# Allegro board AC7Z035.brd
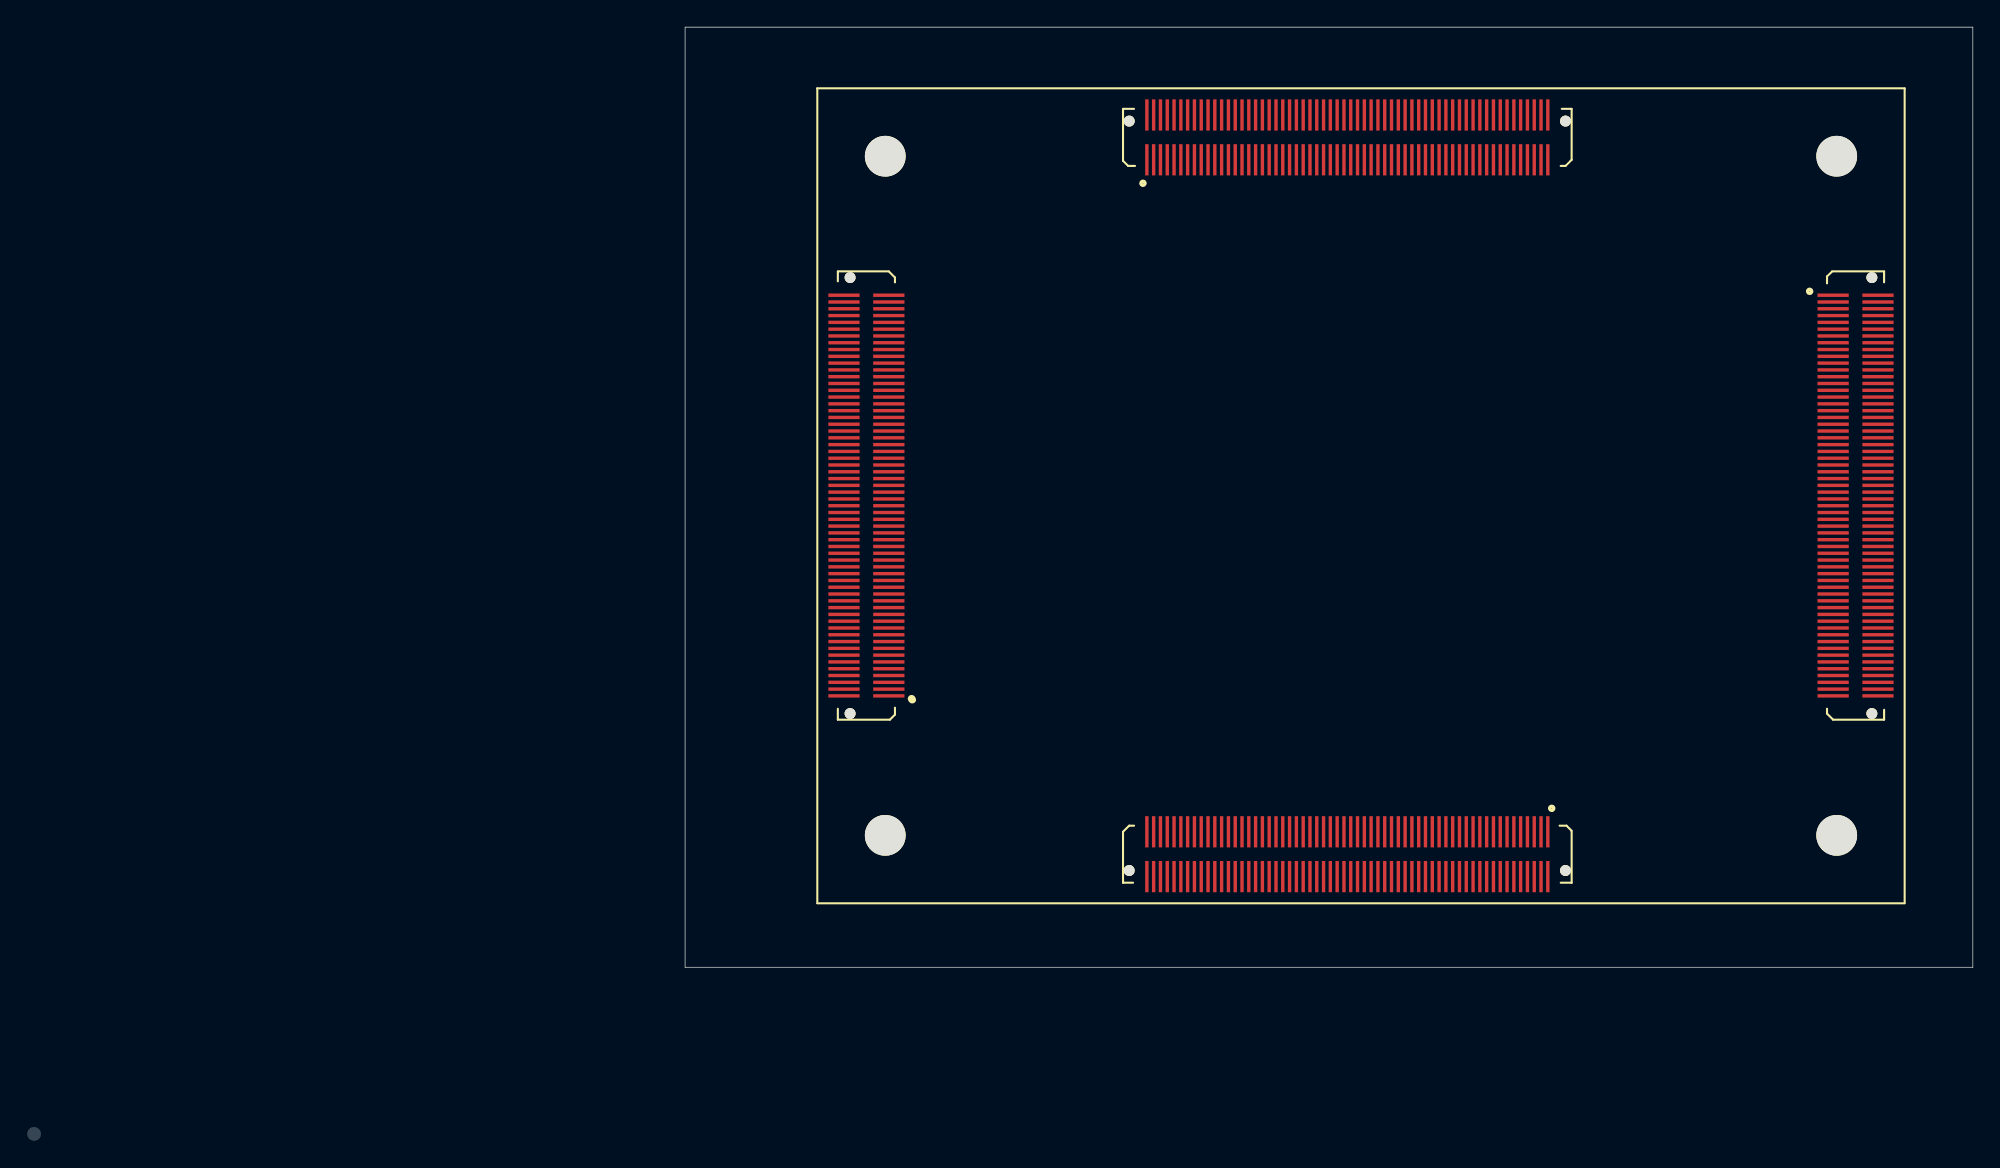
[diagram p0: board, top side]
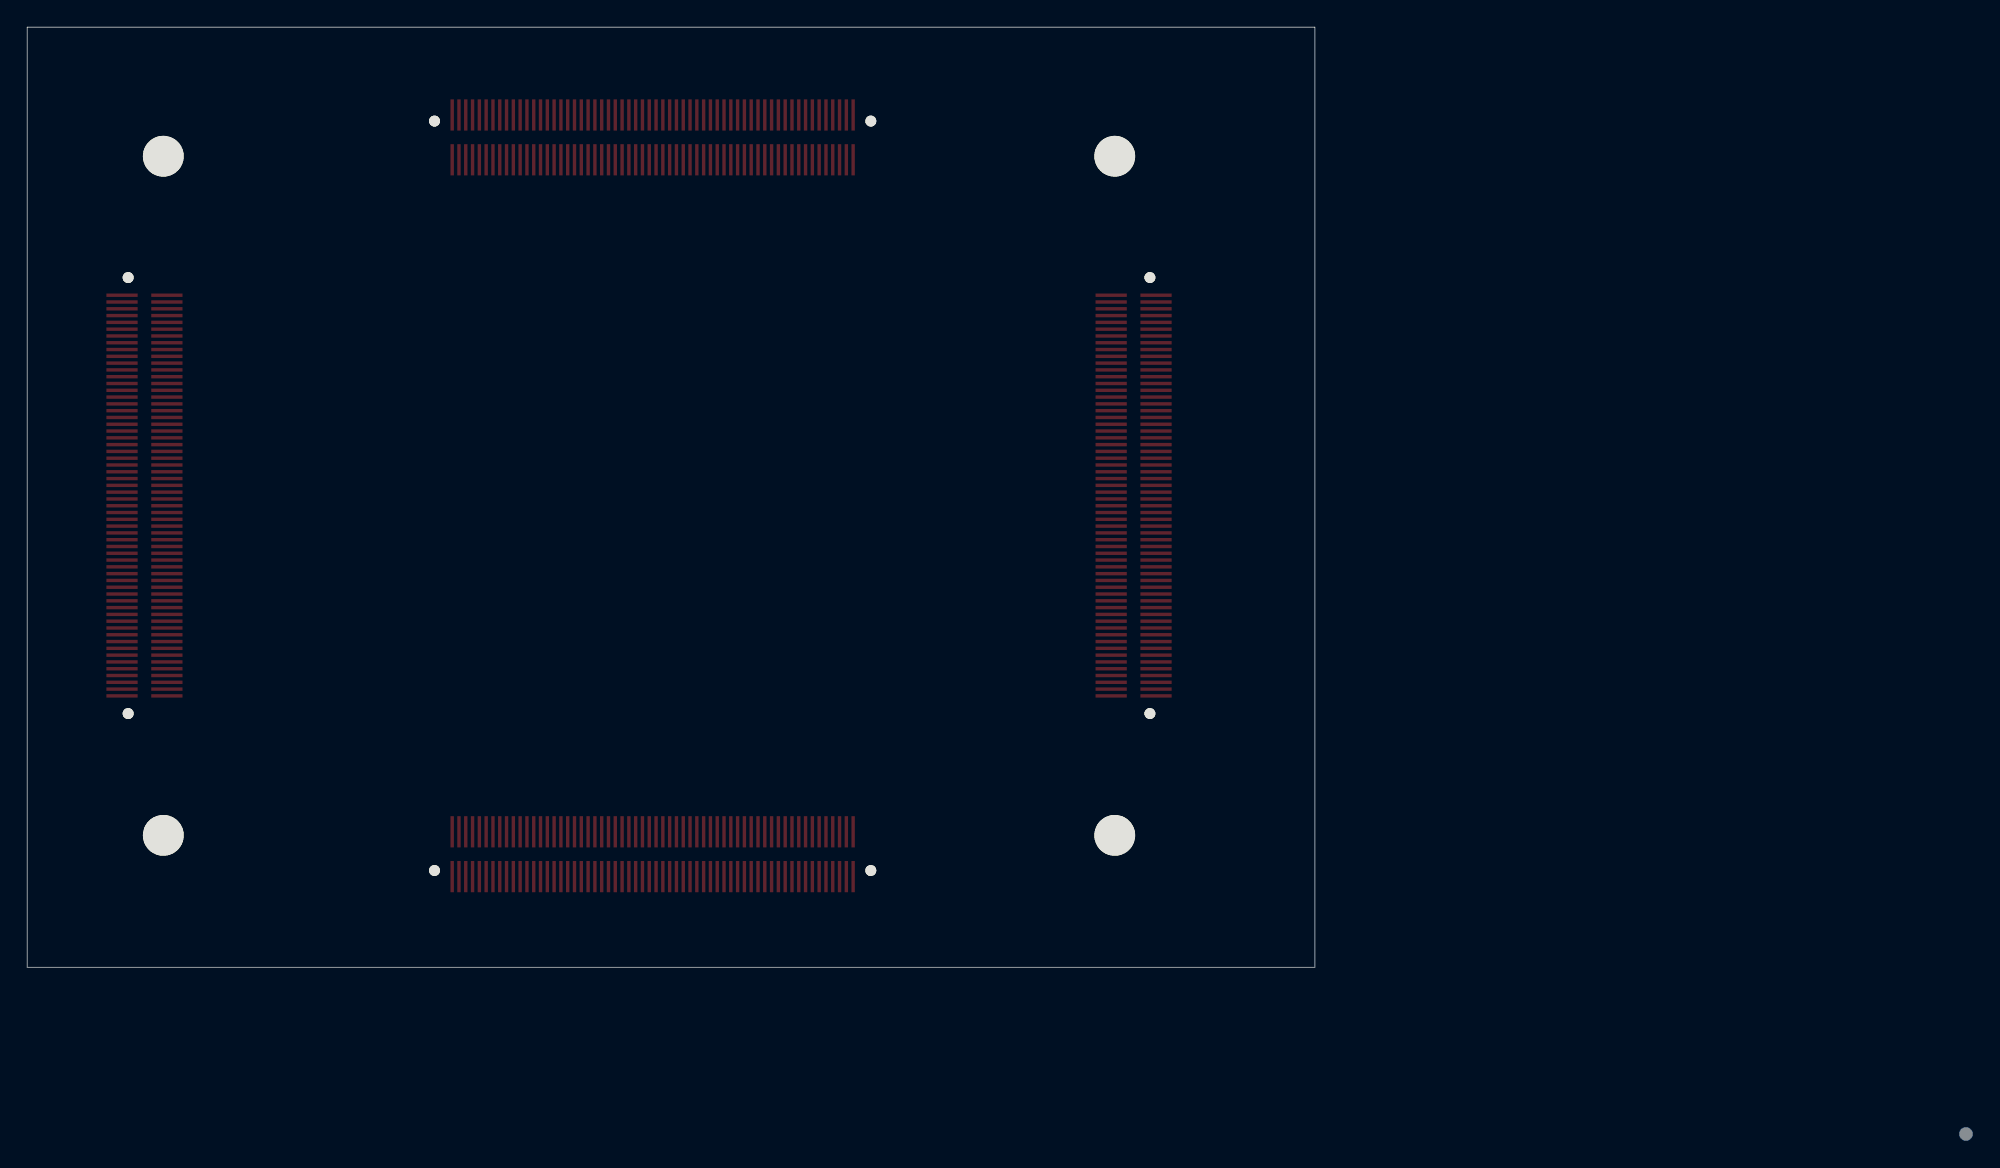
[diagram p1: board, bottom side, seen from below]

Outline 94.74 x 69.22 mm; copper layers: TOP, L2_GND, L3, L4_VCC, L5_GND, BOTTOM. Coordinates in mm from the lower left corner of the outline.
Outline path: 0,69.22 0,0 94.74,0 94.74,69.22 0,69.22

## Design rules (mm)
net group GTX_CLK0_C_N: nets GTX_CLK0_C_N GTX_CLK0_C_P
net group GTX_CLK1_C_P: nets GTX_CLK1_C_N GTX_CLK1_C_P
net group GTX_CLK2_C_P: nets GTX_CLK2_C_N GTX_CLK2_C_P
net group IO1_12P: nets IO1_12N IO1_12P
net group IO1_16P: nets IO1_16N IO1_16P
net group LP_CLK_P: nets LP_CLK_N LP_CLK_P
net group LP_LANE0_N: nets LP_LANE0_N LP_LANE0_P
net group LP_LANE1_N: nets LP_LANE1_N LP_LANE1_P
net group PHY_MDI0_N: nets PHY1_MDI0_N PHY1_MDI0_P
net group USB: nets N16523963 N16524061
net group 90OHM: nets DN1 DN2 DN3 DN4 DP1 DP2 DP3 DP4 OTG_D_N OTG_D_P USB_DM USB_DP
net group ETH_RX: nets FPGA_TCK FPGA_TDI FPGA_TMS PHY1_RXCK PHY1_RXCTL PHY1_RXD0 PHY1_RXD1 PHY1_RXD2 PHY1_RXD3 PHY2_RXCK PHY2_RXCTL PHY2_RXD0 PHY2_RXD1 PHY2_RXD2 PHY2_RXD3
net group ETH_TX: nets PHY1_TXCK PHY1_TXCTL PHY1_TXD0 PHY1_TXD1 PHY1_TXD2 PHY1_TXD3 PHY2_TXCK PHY2_TXCTL PHY2_TXD0 PHY2_TXD1 PHY2_TXD2 PHY2_TXD3
net group HDMI: nets HDMI_TX0+ HDMI_TX0- HDMI_TX1+ HDMI_TX1- HDMI_TX2+ HDMI_TX2- HDMI_TXC+ HDMI_TXC- RX_0N RX_0P RX_1N RX_1P RX_2N RX_2P RX_CN RX_CP
net group IO1-DIFF: nets B12_L1_N B12_L1_P B12_L2_N B12_L2_P EX_IO1_1N EX_IO1_1P EX_IO1_2N EX_IO1_2P EX_IO1_3N EX_IO1_3P EX_IO1_4N EX_IO1_4P EX_IO1_5N EX_IO1_5P EX_IO1_6N EX_IO1_6P EX_IO1_7N EX_IO1_7P EX_IO1_8N EX_IO1_8P EX_IO1_9N EX_IO1_9P EX_IO1_10N EX_IO1_10P EX_IO1_11N EX_IO1_11P EX_IO1_12N EX_IO1_12P EX_IO1_13N EX_IO1_13P EX_IO1_14N EX_IO1_14P EX_IO1_15N EX_IO1_15P EX_IO1_16N EX_IO1_16P EX_IO1_17N EX_IO1_17P FAN_PWM IO1_3N IO1_3P IO1_4N IO1_4P IO1_5N IO1_5P IO1_6N IO1_6P IO1_7N IO1_7P IO1_8N IO1_8P IO1_9N IO1_9P IO1_10N IO1_10P IO1_11N IO1_11P IO1_13N IO1_13P IO1_14N IO1_14P IO1_15N IO1_15P IO1_17N IO1_17P
net group MIPI: nets MIPI_CLK_N MIPI_CLK_P MIPI_LAN0_N MIPI_LAN0_P MIPI_LAN1_N MIPI_LAN1_P
net group OTG_DATA: nets OTG_CLK OTG_DATA0 OTG_DATA1 OTG_DATA2 OTG_DATA3 OTG_DATA4 OTG_DATA5 OTG_DATA6 OTG_DATA7 OTG_DIR OTG_NXT OTG_STP
net group PCIE: nets N23088557 N23088559 N23088561 N23088563 N23088565 N23088567 N23088569 N23088571 N23088604 N23088606 N23088796 N23088798 N23088830 N23088832 N23088856 N23088858 N23088877 N23088892
net group PHY_MDI: nets PHY1_MDI1_N PHY1_MDI1_P PHY1_MDI2_N PHY1_MDI2_P PHY1_MDI3_N PHY1_MDI3_P PHY2_MDI0_N PHY2_MDI0_P PHY2_MDI1_N PHY2_MDI1_P PHY2_MDI2_N PHY2_MDI2_P PHY2_MDI3_N PHY2_MDI3_P
net group SATA-DIFF: nets GTX_CLK0_N GTX_CLK0_P GTX_CLK1_N GTX_CLK1_P GTX_CLK2_N GTX_CLK2_P REF_CLK0_N REF_CLK0_P SATA1_RX_N SATA1_RX_P SATA1_TX_C_N SATA1_TX_C_P SATA2_RX_C_N SATA2_RX_C_P SATA2_RX_N SATA2_RX_P SATA2_TX_N SATA2_TX_P
net group SD_D: nets SD_CLK SD_CMD SD_D0 SD_D1 SD_D2 SD_D3
nets with their own width: min track width 0.203; nets GND
nets with their own width: min track width 0.254; nets +3.3V

## Placement (name value [footprint] x y rotation side)
J29  -  [AXK620337YG]  48.72 8.32 180 top
J30  -  [AXK620337YG]  13.34 34.73 90 top
J31  -  [AXK620337YG]  48.72 61.1 0 top
J32  -  [AXK620337YG]  86.11 34.73 270 top
NOREF  -  [unnamed]  49.73 34.71 180 top
NOREF#2  -  [#2]  163.82 -6.89 90 top
NOREF#3  -  [#2]  -50.04 90.6 0 top
NOREF#4  -  [unnamed#3]  -47.9 -12.27 0 bottom

## Library data of the parts
J29-J32 = CONN SOCKET 60x2_0

## Footprints (pads in the part's own frame, mm; a bottom-side part is the same pattern mirrored in y, then rotated)
AXK620337YG
  round 0.8 hole 0.8 unplated: (-16.05,1.2) (16.05,1.2)
  rect 0.25x2.3 smd: 1(-14.75,-1.65) 2(-14.75,1.65) 3(-14.25,-1.65) 4(-14.25,1.65) 5(-13.75,-1.65) 6(-13.75,1.65) 7(-13.25,-1.65) 8(-13.25,1.65) 9(-12.75,-1.65) 10(-12.75,1.65) 11(-12.25,-1.65) 12(-12.25,1.65) 13(-11.75,-1.65) 14(-11.75,1.65) 15(-11.25,-1.65) 16(-11.25,1.65) 17(-10.75,-1.65) 18(-10.75,1.65) 19(-10.25,-1.65) 20(-10.25,1.65) 21(-9.75,-1.65) 22(-9.75,1.65) 23(-9.25,-1.65) 24(-9.25,1.65) 25(-8.75,-1.65) 26(-8.75,1.65) 27(-8.25,-1.65) 28(-8.25,1.65) 29(-7.75,-1.65) 30(-7.75,1.65) 31(-7.25,-1.65) 32(-7.25,1.65) 33(-6.75,-1.65) 34(-6.75,1.65) 35(-6.25,-1.65) 36(-6.25,1.65) 37(-5.75,-1.65) 38(-5.75,1.65) 39(-5.25,-1.65) 40(-5.25,1.65) 41(-4.75,-1.65) 42(-4.75,1.65) 43(-4.25,-1.65) 44(-4.25,1.65) 45(-3.75,-1.65) 46(-3.75,1.65) 47(-3.25,-1.65) 48(-3.25,1.65) 49(-2.75,-1.65) 50(-2.75,1.65) 51(-2.25,-1.65) 52(-2.25,1.65) 53(-1.75,-1.65) 54(-1.75,1.65) 55(-1.25,-1.65) 56(-1.25,1.65) 57(-0.75,-1.65) 58(-0.75,1.65) 59(-0.25,-1.65) 60(-0.25,1.65) 61(0.25,-1.65) 62(0.25,1.65) 63(0.75,-1.65) 64(0.75,1.65) 65(1.25,-1.65) 66(1.25,1.65) 67(1.75,-1.65) 68(1.75,1.65) 69(2.25,-1.65) 70(2.25,1.65) 71(2.75,-1.65) 72(2.75,1.65) 73(3.25,-1.65) 74(3.25,1.65) 75(3.75,-1.65) 76(3.75,1.65) 77(4.25,-1.65) 78(4.25,1.65) 79(4.75,-1.65) 80(4.75,1.65) 81(5.25,-1.65) 82(5.25,1.65) 83(5.75,-1.65) 84(5.75,1.65) 85(6.25,-1.65) 86(6.25,1.65) 87(6.75,-1.65) 88(6.75,1.65) 89(7.25,-1.65) 90(7.25,1.65) 91(7.75,-1.65) 92(7.75,1.65) 93(8.25,-1.65) 94(8.25,1.65) 95(8.75,-1.65) 96(8.75,1.65) 97(9.25,-1.65) 98(9.25,1.65) 99(9.75,-1.65) 100(9.75,1.65) 101(10.25,-1.65) 102(10.25,1.65) 103(10.75,-1.65) 104(10.75,1.65) 105(11.25,-1.65) 106(11.25,1.65) 107(11.75,-1.65) 108(11.75,1.65) 109(12.25,-1.65) 110(12.25,1.65) 111(12.75,-1.65) 112(12.75,1.65) 113(13.25,-1.65) 114(13.25,1.65) 115(13.75,-1.65) 116(13.75,1.65) 117(14.25,-1.65) 118(14.25,1.65) 119(14.75,-1.65) 120(14.75,1.65)
unnamed
  round 6.35 hole 3 unplated: (-35,25) (-35,-25) (35,25) (35,-25)
unnamed#3
  round 1.016 smd: 1(0,0)

## Nets
+5V: J32.107(54) J32.108(114) J32.109(55) J32.110(115) J32.111(56) J32.112(116) J32.113(57) J32.114(117) J32.115(58) J32.116(118) J32.117(59) J32.118(119) J32.119(60) J32.120
GND: J29.5(3) J29.6(63) J29.11(6) J29.12(66) J29.17(9) J29.18(69) J29.23(12) J29.24(72) J29.29(15) J29.30(75) J29.35(18) J29.36(78) J29.41(21) J29.42(81) J29.47(24) J29.48(84) J29.53(27) J29.54(87) J29.59(30) J29.60(90) J29.65(33) J29.66(93) J29.71(36) J29.72(96) J29.77(39) J29.78(99) J29.83(42) J29.84(102) J29.89(45) J29.90(105) J29.95(48) J29.96(108) J29.101(51) J29.102(111) J29.107(54) J29.108(114) J29.113(57) J29.114(117) J29.119(60) J29.120 J30.5(3) J30.6(63) J30.11(6) J30.12(66) J30.17(9) J30.18(69) J30.23(12) J30.24(72) J30.29(15) J30.30(75) J30.35(18) J30.36(78) J30.41(21) J30.42(81) J30.47(24) J30.48(84) J30.53(27) J30.54(87) J30.59(30) J30.60(90) J30.65(33) J30.66(93) J30.71(36) J30.72(96) J30.77(39) J30.78(99) J30.83(42) J30.84(102) J30.89(45) J30.90(105) J30.95(48) J30.96(108) J30.101(51) J30.102(111) J30.107(54) J30.108(114) J30.113(57) J30.114(117) J30.119(60) J30.120 J31.5(3) J31.6(63) J31.11(6) J31.12(66) J31.17(9) J31.18(69) J31.23(12) J31.24(72) J31.29(15) J31.30(75) J31.35(18) J31.36(78) J31.41(21) J31.42(81) J31.47(24) J31.48(84) J31.53(27) J31.54(87) J31.59(30) J31.60(90) J31.65(33) J31.66(93) J31.71(36) J31.72(96) J31.77(39) J31.78(99) J31.83(42) J31.84(102) J31.89(45) J31.90(105) J31.95(48) J31.96(108) J31.101(51) J31.102(111) J31.107(54) J31.108(114) J31.113(57) J31.114(117) J31.119(60) J31.120 J32.5(3) J32.6(63) J32.11(6) J32.12(66) J32.17(9) J32.18(69) J32.23(12) J32.24(72) J32.29(15) J32.30(75) J32.35(18) J32.36(78) J32.41(21) J32.42(81) J32.47(24) J32.48(84) J32.53(27) J32.54(87) J32.59(30) J32.60(90) J32.65(33) J32.66(93) J32.71(36) J32.72(96) J32.77(39) J32.78(99) J32.83(42) J32.84(102) J32.89(45) J32.90(105) J32.95(48) J32.96(108) J32.101(51) J32.102(111)
9013_CLK: J32.86(103)
9013_D0: J32.92(106)
9013_D1: J32.88(104)
9013_D2: J32.105(53)
9013_D3: J32.103(52)
9013_D4: J32.99(50)
9013_D5: J32.97(49)
9013_D6: J32.93(47)
9013_D7: J32.91(46)
9013_D8: J32.87(44)
9013_D9: J32.85(43)
9013_D10: J29.1
9013_D11: J29.3(2)
9013_D12: J29.7(4)
9013_D13: J29.9(5)
9013_D14: J29.13(7)
9013_D15: J29.15(8)
9013_D16: J29.19(10)
9013_D17: J29.21(11)
9013_D18: J29.25(13)
9013_D19: J29.27(14)
9013_D20: J29.31(16)
9013_D21: J29.33(17)
9013_D22: J29.37(19)
9013_D23: J29.39(20)
9013_DE: J32.94(107)
9013_HS: J32.98(109)
9013_NRESET: J29.43(22)
9013_SCL: J32.106(113)
9013_SDA: J32.104(112)
9013_VS: J32.100(110)
B12_L1_N: J29.117(59)
B12_L1_P: J29.115(58)
B12_L2_N: J29.118(119)
B12_L2_P: J29.116(118)
CAM_CLK: J29.40(80)
CAM_GPIO: J29.38(79)
CAM_SCL: J29.44(82)
CAM_SDA: J29.46(83)
FAN_PWM: J29.51(26)
FPGA_TCK: J31.1
FPGA_TDI: J31.2(61)
FPGA_TDO: J31.4(62)
FPGA_TMS: J31.3(2)
GTX_CLK0_C_N: J30.25(13)
GTX_CLK0_C_P: J30.27(14)
GTX_CLK1_C_N: J30.110(115)
GTX_CLK1_C_P: J30.112(116)
GTX_CLK2_C_N: J30.109(55)
GTX_CLK2_C_P: J30.111(56)
HDMI_CLK: J31.43(22)
HDMI_D0: J31.15(8)
HDMI_D1: J31.19(10)
HDMI_D2: J31.21(11)
HDMI_D3: J31.25(13)
HDMI_D4: J31.27(14)
HDMI_D5: J31.31(16)
HDMI_D6: J31.33(17)
HDMI_D7: J31.37(19)
HDMI_D8: J31.39(20)
HDMI_D9: J31.45(23)
HDMI_D10: J31.49(25)
HDMI_D11: J31.51(26)
HDMI_D12: J31.55(28)
HDMI_D13: J31.57(29)
HDMI_D14: J31.61(31)
HDMI_D15: J31.63(32)
HDMI_D16: J31.67(34)
HDMI_D17: J31.69(35)
HDMI_D18: J31.73(37)
HDMI_D19: J31.75(38)
HDMI_D20: J31.79(40)
HDMI_D21: J31.81(41)
HDMI_D22: J31.70(95)
HDMI_D23: J31.68(94)
HDMI_DE: J31.13(7)
HDMI_HSYNC: J31.9(5)
HDMI_INT: J31.52(86)
HDMI_SCL: J31.62(91)
HDMI_SDA: J31.64(92)
HDMI_VSYNC: J31.7(4)
I2C_SCL: J29.57(29)
I2C_SDA: J29.55(28)
IO1_3N: J29.111(56)
IO1_3P: J29.109(55)
IO1_4N: J29.112(116)
IO1_4P: J29.110(115)
IO1_5N: J29.105(53)
IO1_5P: J29.103(52)
IO1_6N: J29.106(113)
IO1_6P: J29.104(112)
IO1_7N: J29.99(50)
IO1_7P: J29.97(49)
IO1_8N: J29.100(110)
IO1_8P: J29.98(109)
IO1_9N: J29.93(47)
IO1_9P: J29.91(46)
IO1_10N: J29.94(107)
IO1_10P: J29.92(106)
IO1_11N: J29.87(44)
IO1_11P: J29.85(43)
IO1_12N: J29.88(104)
IO1_12P: J29.86(103)
IO1_13N: J29.81(41)
IO1_13P: J29.79(40)
IO1_14N: J29.82(101)
IO1_14P: J29.80(100)
IO1_15N: J29.75(38)
IO1_15P: J29.73(37)
IO1_16N: J29.76(98)
IO1_16P: J29.74(97)
IO1_17N: J29.70(95)
IO1_17P: J29.68(94)
LP_CLK_N: J29.32(76)
LP_CLK_P: J29.34(77)
LP_LANE0_N: J29.20(70)
LP_LANE0_P: J29.22(71)
LP_LANE1_N: J29.26(73)
LP_LANE1_P: J29.28(74)
MIPI_CLK_N: J29.14(67)
MIPI_CLK_P: J29.16(68)
MIPI_LAN0_N: J29.2(61)
MIPI_LAN0_P: J29.4(62)
MIPI_LAN1_N: J29.8(64)
MIPI_LAN1_P: J29.10(65)
OTG_CLK: J32.44(82)
OTG_DATA0: J32.50(85)
OTG_DATA1: J32.52(86)
OTG_DATA2: J32.56(88)
OTG_DATA3: J32.58(89)
OTG_DATA4: J32.62(91)
OTG_DATA5: J32.64(92)
OTG_DATA6: J32.68(94)
OTG_DATA7: J32.70(95)
OTG_DIR: J32.40(80)
OTG_NXT: J32.46(83)
OTG_RESET: J32.19(10)
OTG_STP: J32.38(79)
PCIE_CLK_N: J30.55(28)
PCIE_CLK_P: J30.57(29)
PCIE_PERST: J29.45(23)
PCIE_RX0_N: J30.50(85)
PCIE_RX0_P: J30.52(86)
PCIE_RX1_N: J30.44(82)
PCIE_RX1_P: J30.46(83)
PCIE_RX2_N: J30.38(79)
PCIE_RX2_P: J30.40(80)
PCIE_RX3_N: J30.32(76)
PCIE_RX3_P: J30.34(77)
PCIE_RX4_N: J30.20(70)
PCIE_RX4_P: J30.22(71)
PCIE_RX5_N: J30.14(67)
PCIE_RX5_P: J30.16(68)
PCIE_RX6_N: J30.8(64)
PCIE_RX6_P: J30.10(65)
PCIE_RX7_N: J30.2(61)
PCIE_RX7_P: J30.4(62)
PCIE_TX0_N: J30.49(25)
PCIE_TX0_P: J30.51(26)
PCIE_TX1_N: J30.43(22)
PCIE_TX1_P: J30.45(23)
PCIE_TX2_N: J30.37(19)
PCIE_TX2_P: J30.39(20)
PCIE_TX3_N: J30.31(16)
PCIE_TX3_P: J30.33(17)
PCIE_TX4_N: J30.19(10)
PCIE_TX4_P: J30.21(11)
PCIE_TX5_N: J30.13(7)
PCIE_TX5_P: J30.15(8)
PCIE_TX6_N: J30.7(4)
PCIE_TX6_P: J30.9(5)
PCIE_TX7_N: J30.1
PCIE_TX7_P: J30.3(2)
PHY1_MDC: J32.13(7)
PHY1_MDIO: J32.15(8)
PHY1_RXCK: J32.34(77)
PHY1_RXCTL: J32.32(76)
PHY1_RXD0: J32.28(74)
PHY1_RXD1: J32.26(73)
PHY1_RXD2: J32.22(71)
PHY1_RXD3: J32.20(70)
PHY1_TXCK: J32.14(67)
PHY1_TXCTL: J32.16(68)
PHY1_TXD0: J32.2(61)
PHY1_TXD1: J32.4(62)
PHY1_TXD2: J32.8(64)
PHY1_TXD3: J32.10(65)
PHY2_MDC: J31.44(82)
PHY2_MDIO: J31.46(83)
PHY2_RESET: J31.50(85)
PHY2_RXCK: J31.40(80)
PHY2_RXCTL: J31.38(79)
PHY2_RXD0: J31.34(77)
PHY2_RXD1: J31.32(76)
PHY2_RXD2: J31.28(74)
PHY2_RXD3: J31.26(73)
PHY2_TXCK: J31.20(70)
PHY2_TXCTL: J31.22(71)
PHY2_TXD0: J31.8(64)
PHY2_TXD1: J31.10(65)
PHY2_TXD2: J31.14(67)
PHY2_TXD3: J31.16(68)
PL_KEY1: J29.56(88)
PL_KEY2: J29.58(89)
PL_KEY3: J29.62(91)
PL_KEY4: J29.64(92)
PL_LED1: J29.61(31)
PL_LED2: J29.63(32)
PL_LED3: J29.67(34)
PL_LED4: J29.69(35)
PS_MIO4: J32.3(2)
PS_MIO5: J32.1
PS_POR_B: J31.115(58)
REF_CLK0_N: J31.58(89)
REF_CLK0_P: J31.56(88)
REF_CLK_C_P: J29.49(25)
SATA1_RX_N: J30.103(52)
SATA1_RX_P: J30.105(53)
SATA1_TX_N: J30.97(49)
SATA1_TX_P: J30.99(50)
SATA2_RX_N: J30.75(38)
SATA2_RX_P: J30.73(37)
SATA2_TX_N: J30.81(41)
SATA2_TX_P: J30.79(40)
SD_CLK: J32.25(13)
SD_CMD: J32.27(14)
SD_D0: J32.31(16)
SD_D1: J32.33(17)
SD_D2: J32.37(19)
SD_D3: J32.39(20)
SFP1_RX_N: J30.98(109)
SFP1_RX_P: J30.100(110)
SFP1_TX_N: J30.104(112)
SFP1_TX_P: J30.106(113)
SFP2_RX_N: J30.86(103)
SFP2_RX_P: J30.88(104)
SFP2_TX_N: J30.92(106)
SFP2_TX_P: J30.94(107)
SFP3_RX_N: J30.74(97)
SFP3_RX_P: J30.76(98)
SFP3_TX_N: J30.80(100)
SFP3_TX_P: J30.82(101)
SFP4_RX_N: J30.62(91)
SFP4_RX_P: J30.64(92)
SFP4_TX_N: J30.68(94)
SFP4_TX_P: J30.70(95)
SFP12_TX_DIS: J29.50(85)
SFP34_TX_DIS: J29.52(86)
SYS_RESET: J31.117(59)
UART_RXD: J32.7(4)
UART_TXD: J32.9(5)

Pads without a net: J30 26 28 56 58 61 63 67 69 85 87 91 93 115 116 117 118; J31 74 76 80 82 85 86 87 88 91 92 93 94 97 98 99 100 103 104 105 106 109 110 111 112 116 118; J32 21 43 45 49 51 55 57 61 63 67 69 73 74 75 76 79 80 81 82; NOREF#4 1
